# Altium PCB ANITA_PCB.PcbDoc
Units mm, origin at the board's own origin, x right, y up, seen from the top; angles counter-clockwise.
Board outline 82 x 51 mm, 2 copper layers (Top Layer, Bottom Layer); 62 components, 0 nets, 330 pads, 4 vias.
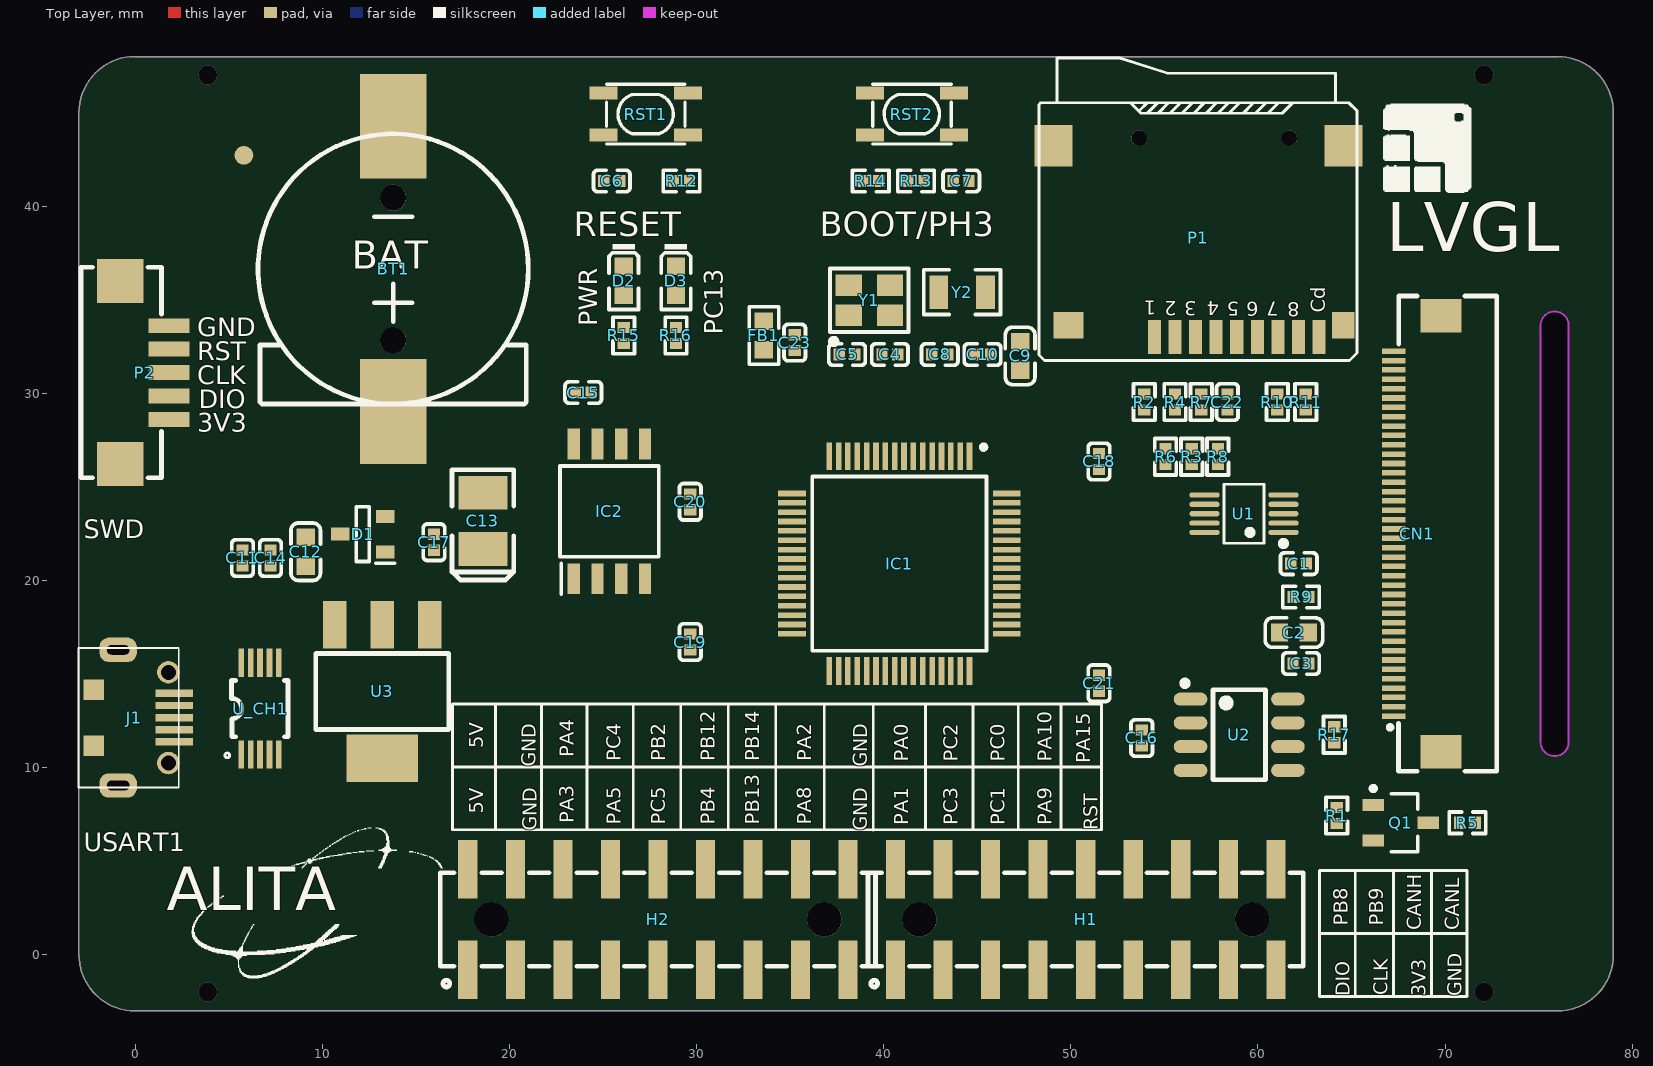
[diagram p0: Top Layer view]
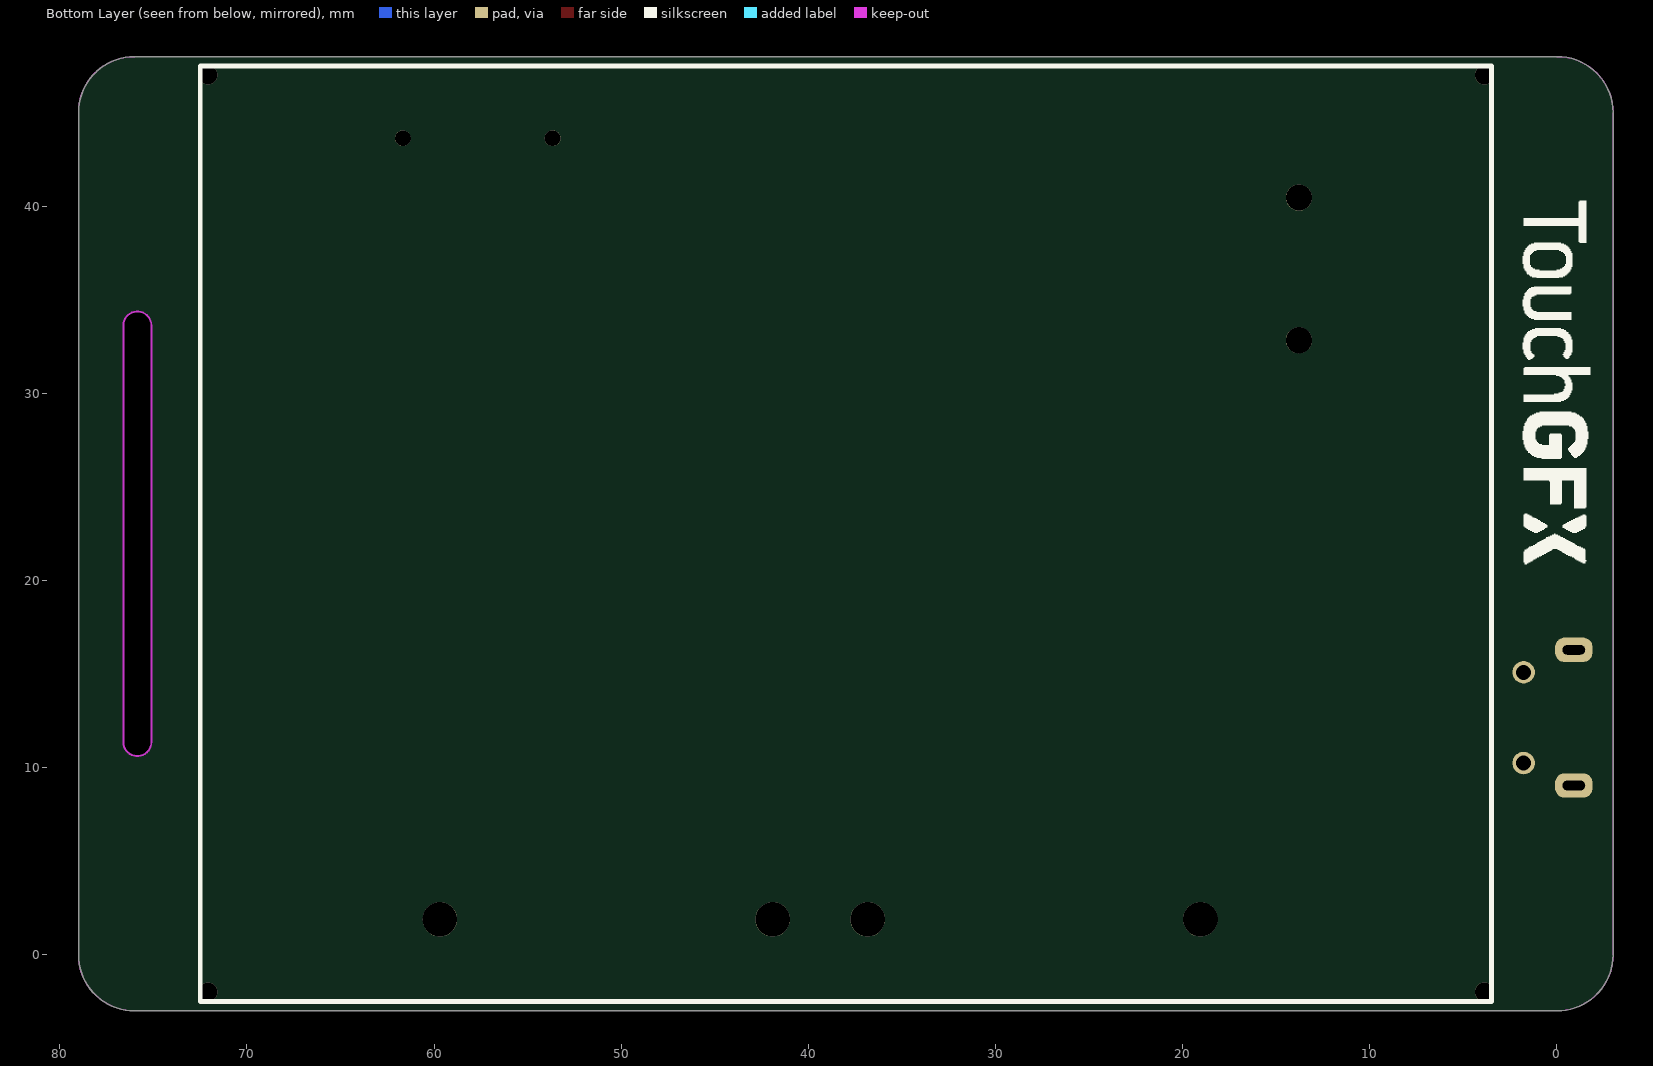
[diagram p1: Bottom Layer view, seen from below]

## Layer stack, top to bottom
Top Solder: solder mask 0.0102, Solder Resist, Dk 3.5
Top Layer: signal copper 0.0356
Dielectric 1: dielectric 0.32, FR-4, Dk 4.8
Bottom Layer: signal copper 0.0356
Bottom Solder: solder mask 0.0102, Solder Resist, Dk 3.5

## Board outline
-3,0 ccw(c0,0) 0,-3 76,-3 ccw(c76,0) 79,0 79,45 ccw(c76,45) 76,48 0,48 ccw(c0,45) -3,45
cut-out: 75.106,11.367 ccw(c75.856,11.367) 76.607,11.367 76.607,33.627 ccw(c75.856,33.627) 75.106,33.627

## Design rules (kind name [scope] priority, off if disabled: settings)
Clearance [All] p1: gap=0.203 ignorepadtopadclearanceinfootprint=TRUE except(0: Arc-Hole Track-Hole SMDPad-Hole THPad-Hole Via-Hole Fill-Hole Poly-Hole Region-Hole Text-Hole)
ComponentClearance [All] p1 off: gap=0.254 collisioncheckmode=3 verticalgap=0.254 showdistances=FALSE
HoleSize [All] p1: absolutevalues=TRUE maxlimit=5 minlimit=0.025 maxpercent=80.000 minpercent=20.000
MinimumSolderMaskSliver [All] p1: minsoldermaskwidth=0
PlaneConnect [All] p1: planeconnectstyle=Direct reliefexpansion=0.508 reliefentries=4 reliefconductorwidth=0.254 reliefairgap=0.254
PolygonConnect [All] p1: connectstyle=Direct reliefconductorwidth=0.254 reliefentries=4 polygonreliefangle="90 Angle" airgapwidth=0.254
RoutingVias [All] p1: holewidth=0.2 width=0.45 viastyle="Through Hole" minholewidth=0.2 minwidth=0.45 maxholewidth=3 maxwidth=6
SilkToSilkClearance [All] p1: silktosilkclearance=0
SilkToSolderMaskClearance [IsPad] p1: minsilkscreentomaskgap=0 clearancetoexposedcopper=TRUE
SolderMaskExpansion [All] p1: expansion=0.102 istentingtop=FALSE
Width [All] p1: maxlimit=2.54 minlimit=0.203 preferedwidth=0.254
24 further rules are at their usual default settings.

## Components (designator, comment, footprint, x,y, rotation, side; value= is the part's Value field where it differs from the comment)
BT1 "Battery" BATTERY 13.918,37.286 r270 top locked
C1 "100nF" 0402_C 62.178,20.903 r180 top
C2 "10uF" 0603_C 61.924,17.22 r0 top
C3 "100nF" 0402_C 62.305,15.569 r0 top
C4 "12pF" 0402_C 40.334,32.079 r0 top
C5 "12pF" 0402_C 38.048,32.079 r180 top
C6 "100nF" 0402_C 25.475,41.35 r0 top
C7 "100nF" 0402_C 44.144,41.35 r0 top
C8 "12pF" 0402_C 43.001,32.079 r0 top
C9 "10uF" 0603_C 47.293,32.002 r270 top
C10 "12pF" 0402_C 45.287,32.079 r180 top
C11 "100nF (104) 10% 50V" 0402_C 5.739,21.207 r270 top
C12 "10uF" 0603_C 9.117,21.538 r270 top
C13 "100uF" CASE-B_3528 18.591,23.189 r270 top
C14 "100nF (104) 10% 50V" 0402_C 7.237,21.207 r270 top
C15 "100nF" 0402_C 23.951,30.047 r0 top
C16 "100nF" 0402_C 53.796,11.588 r270 top
C17 "100nF" 0402_C 15.975,22.046 r90 top
C18 "100nF" 0402_C 51.51,26.364 r90 top
C19 "100nF" 0402_C 29.666,16.712 r270 top
C20 "100nF" 0402_C 29.666,24.205 r90 top
C21 "100nF" 0402_C 51.51,14.509 r90 top
C22 "100nF" 0402_C 58.368,29.539 r270 top
C23 "100nF" 0402_C 35.254,32.714 r270 top
CN1 "LCD" FPC-SMD_40P-P0.50_HDGC_0.5K-DX-40PWB 68.528,22.503 r90 top locked
D1 "BAT54C" SOT95P240X120-3N 12.165,22.477 r180 top
D2 "黄灯 0603" 0603_LED_S1 26.11,36.016 r270 top
D3 "黄灯 0603" 0603_LED_S1 28.904,36.016 r270 top
FB1 "600Ω@100MHz" 0603_R 33.603,33.095 r270 top
H1 "HDR" HDR-SMD_18P-P2.54-V-M-R2-C9-S7.50 50.798,1.89 r0 top
H2 "HDR" HDR-SMD_18P-P2.54-V-M-R2-C9-S7.50 27.939,1.89 r0 top
IC1 "STM32L431RCT6" QFP50P1200X1200X160-64N 40.842,20.903 r270 top locked
IC2 "W25Q64JVSSIQ" SOIC127P790X216-8N 25.348,23.697 r90 top locked
J1 "USB_MICRO_DIP" MICRO_USB_5S 2.099,12.672 r270 top value=USB_micro
P1 "TF_Card_Holder" SD-MICRO-TF 54.469,33.009 r180 top locked
P2 "BM05B-GHS-TBT(LF)(SN)" CONN-SMD_5P-P1.25_HCTL_HC-1.25-5PWT 0.506,31.113 r270 top
Q1 "AO3401A" SOT-23-3L 67.639,7.06 r180 top
R1 "4.7KΩ" 0402_R 64.21,7.441 r270 top
R2 "4.7KΩ (4701) ±1%" 0402_R 53.923,29.539 r90 top
R3 "4.7KΩ" 0402_R 56.463,26.618 r90 top
R4 "4.7KΩ (4701) ±1%" 0402_R 55.574,29.539 r90 top
R5 "4.7Ω" 0402_R 71.195,7.06 r0 top
R6 "4.7KΩ" 0402_R 55.066,26.618 r90 top
R7 "4.7KΩ (4701) ±1%" 0402_R 56.971,29.539 r90 top locked
R8 "4.7KΩ" 0402_R 57.86,26.618 r90 top
R9 "4.7KΩ" 0402_R 62.305,19.125 r180 top
R10 "4.7KΩ (4701) ±1%" 0402_R 61.035,29.539 r270 top
R11 "4.7KΩ (4701) ±1%" 0402_R 62.559,29.539 r270 top
R12 "4.7KΩ" 0402_R 29.202,41.35 r0 top
R13 "120Ω" 0402_R 41.731,41.35 r180 top
R14 "4.7KΩ" 0402_R 39.318,41.35 r0 top
R15 "4.7KΩ (4701) ±1%" 0402_R 26.11,33.095 r270 top
R16 "4.7KΩ (4701) ±1%" 0402_R 28.904,33.095 r270 top
R17 "120Ω" 0402_R 64.083,11.759 r270 top
RST1 "S-KEY-SMD-324225" KEY-SOP324225 25.039,43.799 r180 top
RST2 "S-KEY-SMD-324225" KEY-SOP324225 39.263,43.799 r180 top
U1 "NS2009" MSOP-10_L3.0-W3.0-P0.50-LS5.0-BL#1 59.257,23.57 r90 top
U2 "CAN/TJA1050T/CM" SOIC-8_150mil 59.003,11.759 r270 top
U3 "AMS1117-3.3" SOT-223 12.927,13.74 r180 top
U_CH1 "CH340E" MSOP-10_L3.0-W3.0-P0.50-LS5.0-BL#2 6.679,13.156 r0 top
Y1 "16MHZ 9PF 10PPM" SMD-3225_4P 39.233,34.976 r0 top
Y2 "32.768KHz" "SMD-3215_2P FC - 135" 44.194,35.411 r180 top

## Footprints (in the part's own frame and the unit in brackets; to place one, negate y for a bottom-side part, rotate by r counter-clockwise, add the part's x,y. Pads: shape width x height; smd on the part's side, far side on the other; paste and mask are expansions set on the pad)
0402_C [mm]
  rect 0.6x0.65 smd mask+0.051: 1(-0.425,0) 2(0.425,0)
  silkscreen extent -0.97,-0.58 0.97,0.58, body extent -0.48,-0.3 0.52,0.3, height 0.2
0402_R [mm]
  rect 0.6x0.65 smd mask+0.051: 1(-0.425,0) 2(0.425,0)
  silkscreen extent -0.97,-0.58 0.97,0.58, body extent -0.57,-0.27 0.58,0.28, height 0.41
0603_C [mm]
  rect 0.93x0.98 smd: 1(-0.77,0) 2(0.77,0)
  silkscreen extent -1.53,-0.79 1.54,0.79, body extent -0.8,-0.4 0.8,0.4, height 0.3
0603_LED_S1 [mm]
  rect 0.93x0.98 smd: A(0.77,0) K(-0.77,0)
  silkscreen extent -1.98,-0.79 1.54,0.79, body extent -0.8,-0.4 0.8,0.4, height 0.6
0603_R [mm]
  rect 0.93x0.98 smd: 1(-0.77,0) 2(0.77,0)
  silkscreen extent -1.53,-0.79 1.54,0.79, body extent -0.85,-0.4 0.85,0.4, height 0.56
BATTERY [mil]
  rect 220x140 smd: 1(325,-5) 2(-275,-5)
  round 55 hole 55: ""(-125,-5) ""(175,-5)
  silkscreen extent -259,-289 309,279
CASE-B_3528 [mm]
  rect 1.8x2.6 smd: 1(1.5,0) 2(-1.5,0)
  silkscreen extent -2.73,-1.65 3.16,1.65, body extent -1.85,-1.47 1.85,1.46, height 2.03
CONN-SMD_5P-P1.25_HCTL_HC-1.25-5PWT [mm]
  rect 0.8x2.2 smd: 1(2.5,1.3) 2(1.25,1.3) 3(0,1.3) 4(-1.25,1.3) 5(-2.5,1.3)
  rect 2.35x2.5 smd: MP1(-4.88,-1.3) MP2(4.88,-1.3)
  silkscreen extent -5.63,-3.4 5.63,0.9
FPC-SMD_40P-P0.50_HDGC_0.5K-DX-40PWB [mm]
  rect 0.3x1.25 smd: 1(-9.75,1.262) 2(-9.25,1.262) 3(-8.75,1.262) 4(-8.25,1.263) 5(-7.75,1.262) 6(-7.25,1.262) 7(-6.75,1.263) 8(-6.25,1.263) 9(-5.75,1.263) 10(-5.25,1.263) 11(-4.75,1.263) 12(-4.25,1.263) 13(-3.75,1.263) 14(-3.25,1.263) 15(-2.75,1.263) 16(-2.25,1.263) 17(-1.75,1.263) 18(-1.25,1.263) 19(-0.75,1.263) 20(-0.25,1.263) 21(0.25,1.263) 22(0.75,1.263) 23(1.25,1.263) 24(1.75,1.263) 25(2.25,1.263) 26(2.75,1.263) 27(3.25,1.263) 28(3.75,1.263) 29(4.25,1.263) 30(4.75,1.263) 31(5.25,1.263) 32(5.75,1.263) 33(6.25,1.263) 34(6.75,1.263) 35(7.25,1.263) 36(7.75,1.263) 37(8.25,1.263) 38(8.75,1.263) 39(9.25,1.263) 40(9.75,1.263)
  rect 1.8x2.2 smd: 41(11.65,-1.263) 42(-11.65,-1.263)
  silkscreen extent -12.7,-4.24 12.7,1.56
HDR-SMD_18P-P2.54-V-M-R2-C9-S7.50 [mm]
  rect 1.02x3.12 smd: 1(10.16,-2.69) 2(7.62,-2.69) 3(5.08,-2.69) 4(2.54,-2.69) 5(0,-2.69) 6(-2.54,-2.69) 7(-5.08,-2.69) 8(-7.62,-2.69) 9(-10.16,-2.69) 10(-10.16,2.69) 11(-7.62,2.69) 12(-5.08,2.69) 13(-2.54,2.69) 14(0,2.69) 15(2.54,2.69) 16(5.08,2.69) 17(7.62,2.69) 18(10.16,2.69)
  round 1.85 hole 1.85 unplated: ""(-8.89,0) ""(8.89,0)
  silkscreen extent -11.63,-3.61 11.63,2.5
KEY-SOP324225 [mm]
  rect 1.5x0.7 smd: 1(-4.5,0) 1(0,0) 2(-4.5,-2.25) 2(0,-2.25)
  silkscreen extent -4.35,-2.73 -0.15,0.48, body extent -6.44,-2.93 1.7,0.67, height 2.49
MICRO_USB_5S [mm]
  rect 0.4x2 smd: 1(-1.3,0) 2(-0.65,0) 3(0,0) 4(0.65,0) 5(1.3,0)
  round 1.2 hole 0.8: 6(-2.425,-0.32) 7(2.425,-0.32)
  rrect77% 1.3x2 hole 0.5 slot 1.2 at 90 deg: 8(-3.625,-3) 9(3.625,-3)
  rect 1.1x1.1 smd: 10(-1.5,-4.31) 11(1.5,-4.31)
  silkscreen extent -3.73,-5.12 3.73,0.24
MSOP-10_L3.0-W3.0-P0.50-LS5.0-BL#1 [mm]
  oval 0.28x1.62 smd: 1(-1,-2.11) 2(-0.5,-2.11) 3(0,-2.11) 4(0.5,-2.11) 5(1,-2.11) 6(1,2.11) 7(0.5,2.11) 8(0,2.11) 9(-0.5,2.11) 10(-1,2.11)
  silkscreen extent -1.74,-2.26 1.58,1.07
MSOP-10_L3.0-W3.0-P0.50-LS5.0-BL#2 [mm]
  rect 0.305x1.5 smd: 1(-1,-2.451) 2(-0.5,-2.451) 3(0,-2.451) 4(0.5,-2.451) 5(1,-2.451) 6(1,2.451) 7(0.5,2.451) 8(0,2.451) 9(-0.5,2.451) 10(-1,2.451)
  silkscreen extent -1.88,-2.63 1.5,1.5
QFP50P1200X1200X160-64N [mm]
  rect 1.475x0.3 smd: 1(-5.738,3.75) 2(-5.738,3.25) 3(-5.738,2.75) 4(-5.738,2.25) 5(-5.738,1.75) 6(-5.738,1.25) 7(-5.738,0.75) 8(-5.738,0.25) 9(-5.738,-0.25) 10(-5.738,-0.75) 11(-5.738,-1.25) 12(-5.738,-1.75) 13(-5.738,-2.25) 14(-5.738,-2.75) 15(-5.738,-3.25) 16(-5.738,-3.75) 33(5.738,-3.75) 34(5.738,-3.25) 35(5.738,-2.75) 36(5.738,-2.25) 37(5.738,-1.75) 38(5.738,-1.25) 39(5.738,-0.75) 40(5.738,-0.25) 41(5.738,0.25) 42(5.738,0.75) 43(5.738,1.25) 44(5.738,1.75) 45(5.738,2.25) 46(5.738,2.75) 47(5.738,3.25) 48(5.738,3.75)
  rect 0.3x1.475 smd: 17(-3.75,-5.738) 18(-3.25,-5.738) 19(-2.75,-5.738) 20(-2.25,-5.738) 21(-1.75,-5.738) 22(-1.25,-5.738) 23(-0.75,-5.738) 24(-0.25,-5.738) 25(0.25,-5.738) 26(0.75,-5.738) 27(1.25,-5.738) 28(1.75,-5.738) 29(2.25,-5.738) 30(2.75,-5.738) 31(3.25,-5.738) 32(3.75,-5.738) 49(3.75,5.738) 50(3.25,5.738) 51(2.75,5.738) 52(2.25,5.738) 53(1.75,5.738) 54(1.25,5.738) 55(0.75,5.738) 56(0.25,5.738) 57(-0.25,5.738) 58(-0.75,5.738) 59(-1.25,5.738) 60(-1.75,5.738) 61(-2.25,5.738) 62(-2.75,5.738) 63(-3.25,5.738) 64(-3.75,5.738)
  silkscreen extent -6.35,-4.65 4.65,4.65, body extent -6,-6 6,6, height 1.6
SD-MICRO-TF [mm]
  rect 2.032x2.2 smd: 0(-10.1,-10.227) 0(5.4,-10.227)
  rect 1.2x1.4 smd: 0(-10.1,-0.627)
  round 0.85 hole 0.85 unplated: 0(-7.2,-10.627) 0(0.8,-10.627)
  rect 1.6x1.4 smd: 0(4.6,-0.627)
  rect 0.7x1.8 smd: 1(0,0) 2(-1.1,0) 3(-2.2,0) 4(-3.3,0) 5(-4.4,0) 6(-5.5,0) 7(-6.6,0) 8(-7.7,0) 9(-8.8,0)
  silkscreen extent -10.82,-14.91 6.17,1.25, body extent -10.37,-14.85 5.9,0.34, height 1.8
"SMD-3215_2P FC - 135" [mm]
  rect 1x1.8 smd: 1(-1.25,0) 2(1.25,0)
  silkscreen extent -2.05,-1.2 2.05,1.2
SMD-3225_4P [mm]
  rect 1.4x1.15 smd: 1(-1.1,-0.8) 2(1.1,-0.8) 3(1.1,0.8) 4(-1.1,0.8)
  silkscreen extent -2.1,-2.35 2.1,1.7, body extent -1.6,-1.25 1.6,1.25, height 0.61
SOIC127P790X216-8N [mm]
  rect 1.65x0.65 smd: 1(-3.6,1.905) 2(-3.6,0.635) 3(-3.6,-0.635) 4(-3.6,-1.905) 5(3.6,-1.905) 6(3.6,-0.635) 7(3.6,0.635) 8(3.6,1.905)
  silkscreen extent -4.43,-2.64 2.42,2.64, body extent -3.95,-2.64 3.95,2.64, height 2.16
SOIC-8_150mil [mm]
  oval 0.7x1.8 smd: 1(-1.905,-2.6) 2(-0.635,-2.6) 3(0.635,-2.6) 4(1.905,-2.6) 5(1.905,2.6) 6(0.635,2.6) 7(-0.635,2.6) 8(-1.905,2.6)
  silkscreen extent -2.9,-3.05 2.4,1.4
SOT95P240X120-3N [mm]
  rect 1x0.7 smd: 1(-1.2,0.95) 2(-1.2,-0.95) 3(1.2,0)
  silkscreen extent -1.7,-1.46 0.35,1.55, body extent -1.2,-1.46 1.2,1.46, height 1.2
SOT-23-3L [mm] "http://www.aosmd.com/res/packaging_information/SOT-23-3L.pdf"
  rect 1.15x0.65 smd: 1(1.475,-0.95) 2(1.475,0.95) 3(-1.475,0)
  silkscreen extent -0.9,-1.95 1.6,1.55, body extent -0.9,-1.55 0.9,1.55, height 1.25
SOT-223 [mm]
  rect 1.27x2.54 smd: 1(-2.819,-3.886) 2(-0.279,-3.886) 3(2.261,-3.886)
  rect 3.81x2.54 smd: 4(-0.279,3.226)
  silkscreen extent -3.84,-2.36 3.28,1.7, body extent -3.5,-3.93 3,3.03, height 1.66

## Part data
BT1: "Multicell Battery", LatestRevisionDate=17-Jul-2002, LatestRevisionNote="Re-released for DXP Platform.", PackageDescription="Battery; 2 Leads", PackageReference=BAT-2, Published=24-Mar-1999, Publisher="Altium Limited"
C1 C3 C6 C7 C15 C16 C17 C18 C19 C20 C21 C22 C23: library part "0402 100nF (104) 10% 16V", "贴片电容", Package=0402, SuppliersPartNumber=C1525, ComponentLink1Description=供应商链接, ComponentLink1URL=http://www.szlcsc.com/product/details_1877.html, Supplier=LC
C2: library part "0603 10uF (106) 10% 10V", "贴片电容", Package=0603, SuppliersPartNumber=C19702, ComponentLink1Description=供应商链接, ComponentLink1URL=http://www.szlcsc.com/product/details_20411.html, Supplier=LC
C4 C5: library part "0402 20pF (200) 5% 50V", "贴片电容", Package=0402, SuppliersPartNumber=C1554, ComponentLink1Description=供应商链接, ComponentLink1URL=http://www.szlcsc.com/product/details_1906.html, Supplier=LC
C8 C10: library part "0402 10pF (100) 5% 50V", "贴片电容", Package=0402, SuppliersPartNumber=C32949, ComponentLink1Description=供应商链接, ComponentLink1URL=http://www.szlcsc.com/product/details_33914.html, Supplier=LC
C9: library part "0603 4.7uF (475) 10% 16V", "贴片电容", Package=0603, SuppliersPartNumber=C19666, ComponentLink1Description=供应商链接, ComponentLink1URL=http://www.szlcsc.com/product/details_20375.html, Supplier=LC
C11 C14: library part "0603 100nF (104) 10% 50V", "贴片电容", Package=0603, SuppliersPartNumber=C14663, ComponentLink1Description=供应商链接, ComponentLink1URL=http://www.szlcsc.com/product/details_15331.html, Supplier=LC
C12: library part "0805 10uF (106) 10% 25V", "贴片电容", Package=0805, SuppliersPartNumber=C15850, ComponentLink1Description=供应商链接, ComponentLink1URL=http://www.szlcsc.com/product/details_16532.html, Supplier=LC
C13: library part "3528 100uF (107) 10% 6.3V", "钽电容", Package=3528, SuppliersPartNumber=C16133, ComponentLink1Description=供应商链接, ComponentLink1URL=http://www.szlcsc.com/product/details_16815.html, Supplier=LC
CN1: library part FPC_40P_LCD
D1: "双肖特基二极管"
D2 D3: library part "0603 黄灯", "发光二极管", Package=0603, SuppliersPartNumber=C72038, ComponentLink1Description=供应商链接, ComponentLink1URL=http://www.szlcsc.com/product/details_73147.html, Supplier=LC
FB1: library part "0603 100Ω (1000) 1%", "贴片电阻", Package=0603, SuppliersPartNumber=C22775, ComponentLink1Description=供应商链接, ComponentLink1URL=http://www.szlcsc.com/product/details_23502.html, Supplier=LC
H1 H2: BOM_JLCPCB Part Class="Extended Part", BOM_Manufacturer=BOOMELE(博穆精密), BOM_Manufacturer Part=2.54-2*9P立贴针带柱, BOM_Supplier=LCSC, BOM_Supplier Part=C88175, Contributor=LCSC, spicePre=H, spiceSymbolName=HDR
IC1: "Integrated Circuit", Manufacturer_Name=STMicroelectronics, Mouser Part Number=511-STM32L431RCT6, Arrow Part Number=STM32L431RCT6, Arrow Price/Stock=https://www.arrow.com/en/products/stm32l431rct6/stmicroelectronics?region=nac, Datasheet Link=https://www.st.com/resource/en/datasheet/stm32l431rc.pdf, Height=1.6mm, Manufacturer_Part_Number=STM32L431RCT6, Mouser Price/Stock=https://www.mouser.co.uk/ProductDetail/STMicroelectronics/STM32L431RCT6?qs=U58vgkJzipQt4Fiogdks1w%3D%3D
IC2: library part W25Q128FVSIG, "Integrated Circuit", Manufacturer_Name=Winbond, Mouser Part Number=N/A, Arrow Part Number=W25Q128FVSIG, Arrow Price/Stock=https://www.arrow.com/en/products/w25q128fvsig/winbond-electronics, Datasheet Link="https://www.winbond.com/resource-files/w25q128fv rev.m 05132016 kms.pdf", Height=2.16mm, Manufacturer_Part_Number=W25Q128FVSIG, Mouser Price/Stock=https://www.mouser.co.uk/ProductDetail/Winbond/W25Q128FVSIG?qs=rkhjVJ6%2F3EIwu4pV702YLQ%3D%3D
P2: "C2845382", Manufacturer=JST, Package Description="GH Disconnectable Crimp Style Connector, Pitch 1.25 mm, 1 x 5 Position, Height 4.05 mm", Package Reference=BM05B-GHS-TBT, Datasheet URL=http://www.jst-mfg.com/product/pdf/eng/eGH.pdf, Datasheet Version=05/2016, Manufacturer URL=http://www.jst.com/home2.html, Mounting Technology=SurfaceMount, No of Positions=5, Pitch=1.25mm, Style/Orientation=StraightHeader/Plug, Termination=Crimp, Type=WiretoBoard
Q1: library part "AO3401A P道沟 X13A15 SOT-23", "MOS(场效应管)", Package=SOT-23, SuppliersPartNumber=C15127, ComponentLink1Description=供应商链接, ComponentLink1URL=http://www.szlcsc.com/product/details_15801.html, Supplier=LC
R1 R3 R5 R6 R8 R9 R12 R14: library part "0402 10KΩ (1002) 1%", "贴片电阻", Package=0402, SuppliersPartNumber=C25744, ComponentLink1Description=供应商链接, ComponentLink1URL=http://www.szlcsc.com/product/details_26487.html, Supplier=LC
R2 R4 R7 R10 R11 R15 R16: library part "0402 4.7KΩ (4701) 1%", "贴片电阻", Package=0402, SuppliersPartNumber=C25900, ComponentLink1Description=供应商链接, ComponentLink1URL=http://www.szlcsc.com/product/details_26643.html, Supplier=LC
R13 R17: library part "0402 120Ω (1200) 1%", "贴片电阻", Package=0402, SuppliersPartNumber=C25079, ComponentLink1Description=供应商链接, ComponentLink1URL=http://www.szlcsc.com/product/details_25822.html, Supplier=LC
RST1 RST2: "KEY,SMD,324225"
U2: library part CAN/TJA1050T/CM_[C6952], "CAN", Package=SOIC-8_150mil, SuppliersPartNumber=C6952, ComponentLink1Description=供应商链接, ComponentLink1URL=http://www.szlcsc.com/product/details_7424.html, Supplier=LC
U3: library part LDO-AMS1117-3.3, "LDO,1A"
Y1: library part "SMD-3225_4P  16MHZ 9PF 10PPM", "贴片晶振", Package=SMD-3225_4P, SuppliersPartNumber=C13738, ComponentLink1Description=供应商链接, ComponentLink1URL=http://www.szlcsc.com/product/details_14393.html, Supplier=LC
Y2: library part "SMD-3215_2P 32.768KHz 20ppm 12.5pF", "贴片晶振", Package=SMD-3215_2P, SuppliersPartNumber=C32346, ComponentLink1Description=供应商链接, ComponentLink1URL=http://www.szlcsc.com/product/details_33310.html, Supplier=LC
J1: PCB DECAL=MICRO_USB_5S

## Free pads (board coordinates)
  round 1 smd: 2(5.815,42.721)

## Via types
v1: diameter 1, hole 1, Top Layer to Bottom Layer, tented both sides, 4 vias

## Nets (pads, with @x,y where several pads share a name; then routed paths per layer and width w, separated by ;. In a path a pad name is that pad's centre, name@x,y a point inside that pad or via, vN(x,y) a via of type N, cw(c..) or ccw(c..) an arc to the next point about the centre after c; other vN are vias at no path point)
pads on no net: BT1. BT1.1 BT1.2 C1.1 C1.2 C2.1 C2.2 C3.1 C3.2 C4.1 C4.2 C5.1 C5.2 C6.1 C6.2 C7.1 C7.2 C8.1 C8.2 C9.1 C9.2 C10.1 C10.2 C11.1 C11.2 C12.1 C12.2 C13.1 C13.2 C14.1 C14.2 C15.1 C15.2 C16.1 C16.2 C17.1 C17.2 C18.1 C18.2 C19.1 C19.2 C20.1 C20.2 C21.1 C21.2 C22.1 C22.2 C23.1 C23.2 CN1.1 CN1.2 CN1.3 CN1.4 CN1.5 CN1.6 CN1.7 CN1.8 CN1.9 CN1.10 CN1.11 CN1.12 CN1.13 CN1.14 CN1.15 CN1.16 CN1.17 CN1.18 CN1.19 CN1.20 CN1.21 CN1.22 CN1.23 CN1.24 CN1.25 CN1.26 CN1.27 CN1.28 CN1.29 CN1.30 CN1.31 CN1.32 CN1.33 CN1.34 CN1.35 CN1.36 CN1.37 CN1.38 CN1.39 CN1.40 CN1.41 CN1.42 D1.1 D1.2 D1.3 D2.A D2.K D3.A D3.K FB1.1 FB1.2 H1. H1.1 H1.2 H1.3 H1.4 H1.5 H1.6 H1.7 H1.8 H1.9 H1.10 H1.11 H1.12 H1.13 H1.14 H1.15 H1.16 H1.17 H1.18 H2. H2.1 H2.2 H2.3 H2.4 H2.5 H2.6 H2.7 H2.8 H2.9 H2.10 H2.11 H2.12 H2.13 H2.14 H2.15 H2.16 H2.17 H2.18 IC1.1 IC1.2 IC1.3 IC1.4 IC1.5 IC1.6 IC1.7 IC1.8 IC1.9 IC1.10 IC1.11 IC1.12 IC1.13 IC1.14 IC1.15 IC1.16 IC1.17 IC1.18 IC1.19 IC1.20 IC1.21 IC1.22 IC1.23 IC1.24 IC1.25 IC1.26 IC1.27 IC1.28 IC1.29 IC1.30 IC1.31 IC1.32 IC1.33 IC1.34 IC1.35 IC1.36 IC1.37 IC1.38 IC1.39 IC1.40 IC1.41 IC1.42 IC1.43 IC1.44 IC1.45 IC1.46 IC1.47 IC1.48 IC1.49 IC1.50 IC1.51 IC1.52 IC1.53 IC1.54 IC1.55 IC1.56 IC1.57 IC1.58 IC1.59 IC1.60 IC1.61 IC1.62 IC1.63 IC1.64 IC2.1 IC2.2 IC2.3 IC2.4 IC2.5 IC2.6 IC2.7 IC2.8 J1.1 J1.2 J1.3 J1.4 J1.5 J1.6 J1.7 J1.8 J1.9 J1.10 J1.11 P1.0 P1.1 P1.2 P1.3 P1.4 P1.5 P1.6 P1.7 P1.8 P1.9 P2.1 P2.2 P2.3 P2.4 P2.5 P2.MP1 P2.MP2 Q1.1 Q1.2 Q1.3 R1.1 R1.2 R2.1 R2.2 R3.1 R3.2 R4.1 R4.2 R5.1 R5.2 R6.1 R6.2 R7.1 R7.2 R8.1 R8.2 R9.1 R9.2 R10.1 R10.2 R11.1 R11.2 R12.1 R12.2 R13.1 R13.2 R14.1 R14.2 R15.1 R15.2 R16.1 R16.2 R17.1 R17.2 RST1.1 RST1.2 RST2.1 RST2.2 U1.1 U1.2 U1.3 U1.4 U1.5 U1.6 U1.7 U1.8 U1.9 U1.10 U2.1 U2.2 U2.3 U2.4 U2.5 U2.6 U2.7 U2.8 U3.1 U3.2 U3.3 U3.4 U_CH1.1 U_CH1.2 U_CH1.3 U_CH1.4 U_CH1.5 U_CH1.6 U_CH1.7 U_CH1.8 U_CH1.9 U_CH1.10 Y1.1 Y1.2 Y1.3 Y1.4 Y2.1 Y2.2
copper on no net:
  other v1: 3.885,-1.986 72.084,-1.986 3.885,47.014 72.084,47.014

## Keep-outs
Keep-Out Layer:
  lines w0.013: -3,0 ccw(c0,0) 0,-3 76,-3 ccw(c76,0) 79,0 79,45 ccw(c76,45) 76,48 0,48 ccw(c0,45) -3,45 -3,0
  lines w0.102: 75.106,11.367 ccw(c75.856,11.367) 76.607,11.367 76.607,33.627 ccw(c75.856,33.627) 75.106,33.627 75.106,11.367

## Other copper
Top Layer:
  pour cut-out: 5.815,41.221 cw(c5.815,42.721) 4.315,42.721 cw(c5.815,42.721) 5.815,44.221 cw(c5.815,42.721) 7.315,42.721 cw(c5.815,42.721)

## Silkscreen, mask and mechanical layers (free items; w line width, h text height)
Top Overlay:
  drawing of 132 lines, arcs and shapes, not listed
  text "RESET" at 23.436,38.403 h1.3
  text "BOOT/PH3" at 36.6,38.403 h1.3
  text "LVGL" at 66.849,36.701 h4.5
  text "BAT" at 11.591,36.651 h1.5
  text "PWR" at 24.687,33.58 h1 r90
  text "PC13" at 31.393,33.145 h1 r90
  text "GND" at 3.314,33.044 h1
  text "RST" at 3.314,31.761 h1
  text "CLK" at 3.314,30.478 h1
  text "DIO" at 3.397,29.196 h1
  text "3V3" at 3.314,27.938 h1
  text "SWD" at -2.732,21.919 h1.7
  text "5V" at 18.613,11.03 h0.76 r90
  text "PA4" at 23.436,10.547 h0.76 r90
  text "PC4" at 25.949,10.332 h0.76 r90
  text "PB2" at 28.335,10.332 h0.76 r90
  text "PB12" at 30.976,10.332 h0.76 r90
  text "PB14" at 33.362,10.332 h0.76 r90
  text "PA2" at 36.129,10.332 h0.76 r90
  text "PA0" at 41.31,10.306 h0.76 r90
  text "PC2" at 43.95,10.306 h0.76 r90
  text "PC0" at 46.463,10.306 h0.76 r90
  text "PA10" at 48.976,10.306 h0.76 r90
  text "PA15" at 51.052,10.23 h0.76 r90
  text "GND" at 21.69,10.059 h1.27 r90
  text "GND" at 39.394,10.059 h1.27 r90
  text "5V" at 18.613,7.525 h0.76 r90
  text "PA3" at 23.436,7.043 h0.76 r90
  text "PA5" at 25.949,6.941 h0.76 r90
  text "PC5" at 28.335,6.941 h0.76 r90
  text "PB4" at 30.976,6.941 h0.76 r90
  text "PB13" at 33.362,6.941 h0.76 r90
  text "PA8" at 36.129,6.941 h0.76 r90
  text "PA1" at 41.31,6.915 h0.76 r90
  text "PC3" at 43.95,6.916 h0.76 r90
  text "PC1" at 46.463,6.915 h0.76 r90
  text "PA9" at 48.976,6.916 h0.76 r90
  text "RST" at 51.713,6.655 h1.27 r90
  text "GND" at 21.741,6.63 h1.27 r90
  text "GND" at 39.394,6.63 h1.27 r90
  text "USART1" at -2.732,5.18 h1.7
  text "ALITA" at 1.7,1.599 h4
  text "PB8" at 64.798,1.561 h0.76 r90
  text "PB9" at 66.703,1.561 h0.76 r90
  text "CANH" at 68.735,1.307 h0.76 r90
  text "CANL" at 70.767,1.307 h0.76 r90
  text "CLK" at 67.211,-2.156 h1.27 r90
  text "DIO" at 65.179,-2.205 h1.27 r90
  text "3V3" at 69.243,-2.205 h1.27 r90
  text "GND" at 71.148,-2.21 h1.27 r90
Bottom Overlay:
  drawing of 14 lines, arcs and shapes, not listed

## Text inside footprints (layer, text, board x,y; h text height)
BT1: Mechanical 11 "1" at 13.537,29.031 h0.64 r270; Mechanical 11 "2" at 13.537,44.271 h0.64 r270
P1: Top Overlay "Cd" at 63.587,34.304 h0.76 r90; Top Overlay "8" at 62.241,34.863 h0.76 r180; Top Overlay "7" at 61.123,34.888 h0.76 r180; Top Overlay "6" at 60.057,34.888 h0.76 r180; Top Overlay "5" at 58.99,34.888 h0.76 r180; Top Overlay "4" at 57.923,34.914 h0.76 r180; Top Overlay "3" at 56.729,34.914 h0.76 r180; Top Overlay "2" at 55.662,34.914 h0.76 r180; Top Overlay "1" at 54.57,34.939 h0.76 r180